# Altium PCB PCB1.PcbDoc
Units mil, origin at the board's own origin, x right, y up, seen from the top; angles counter-clockwise.
Board outline 1300.91 x 945 mil, 2 copper layers (Top Layer, Bottom Layer); 28 components, 25 nets, 113 pads, 80 vias.
Unrouted connection lines stored in the file: 49.
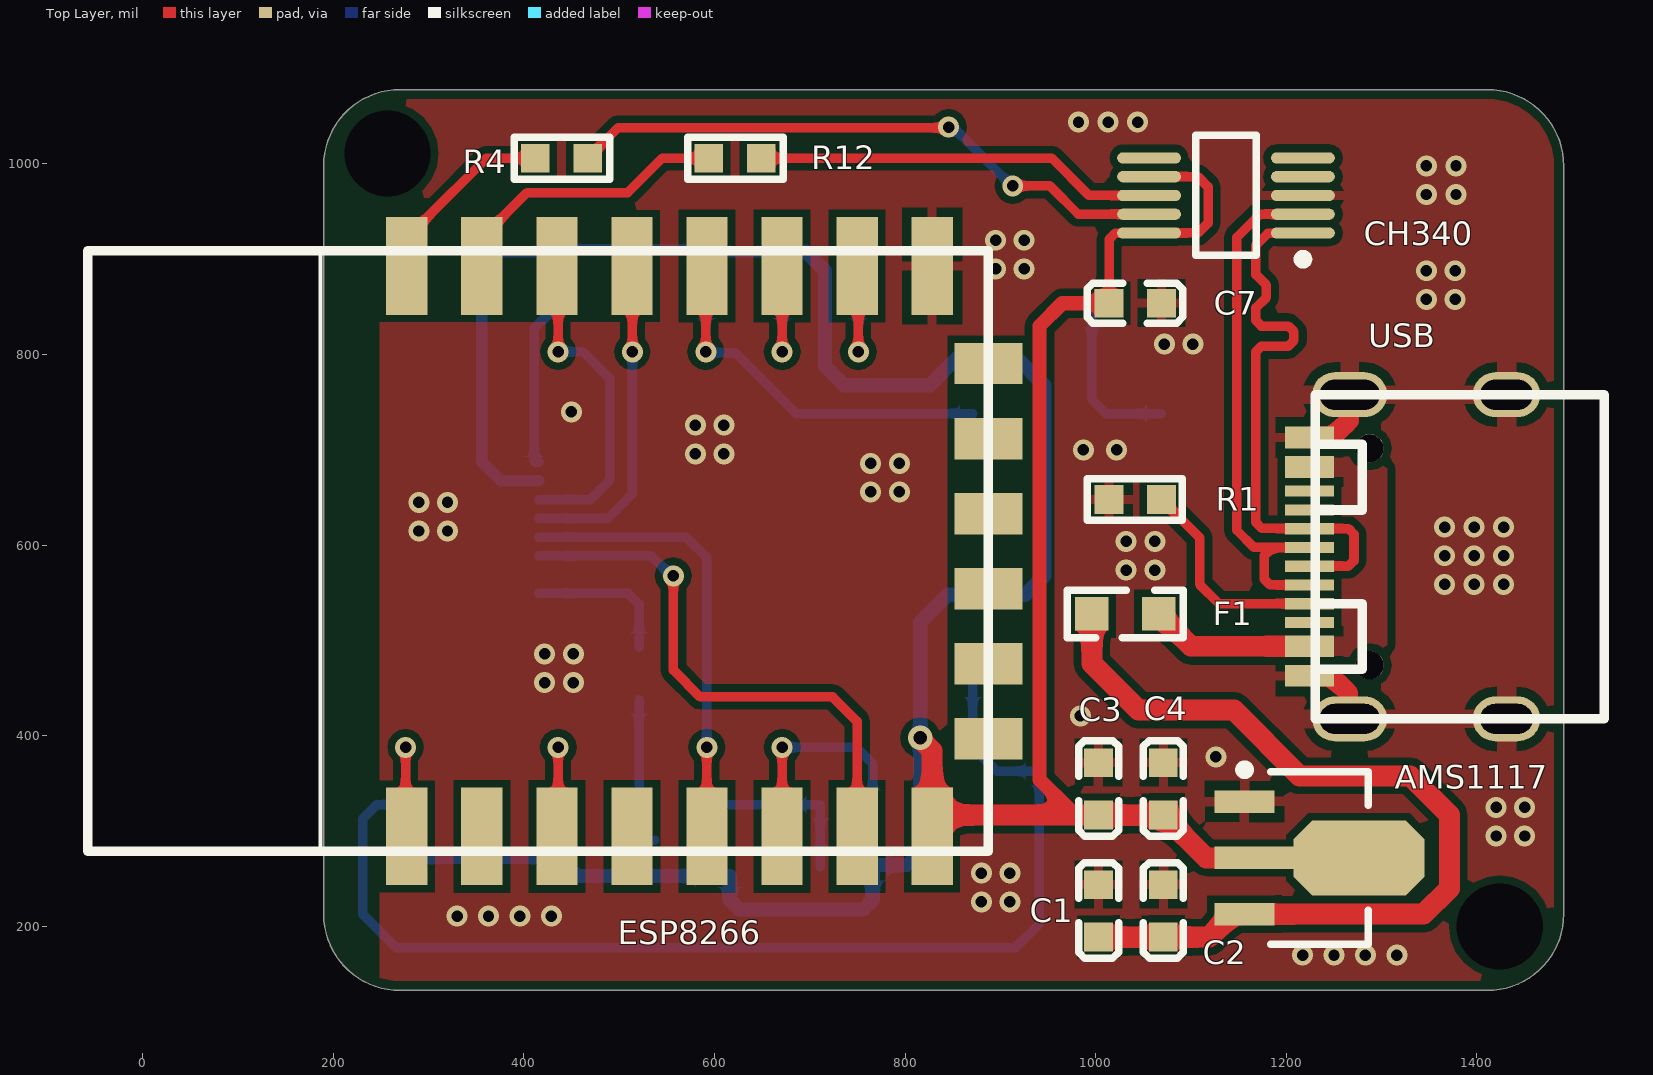
[diagram p0: Top Layer view]
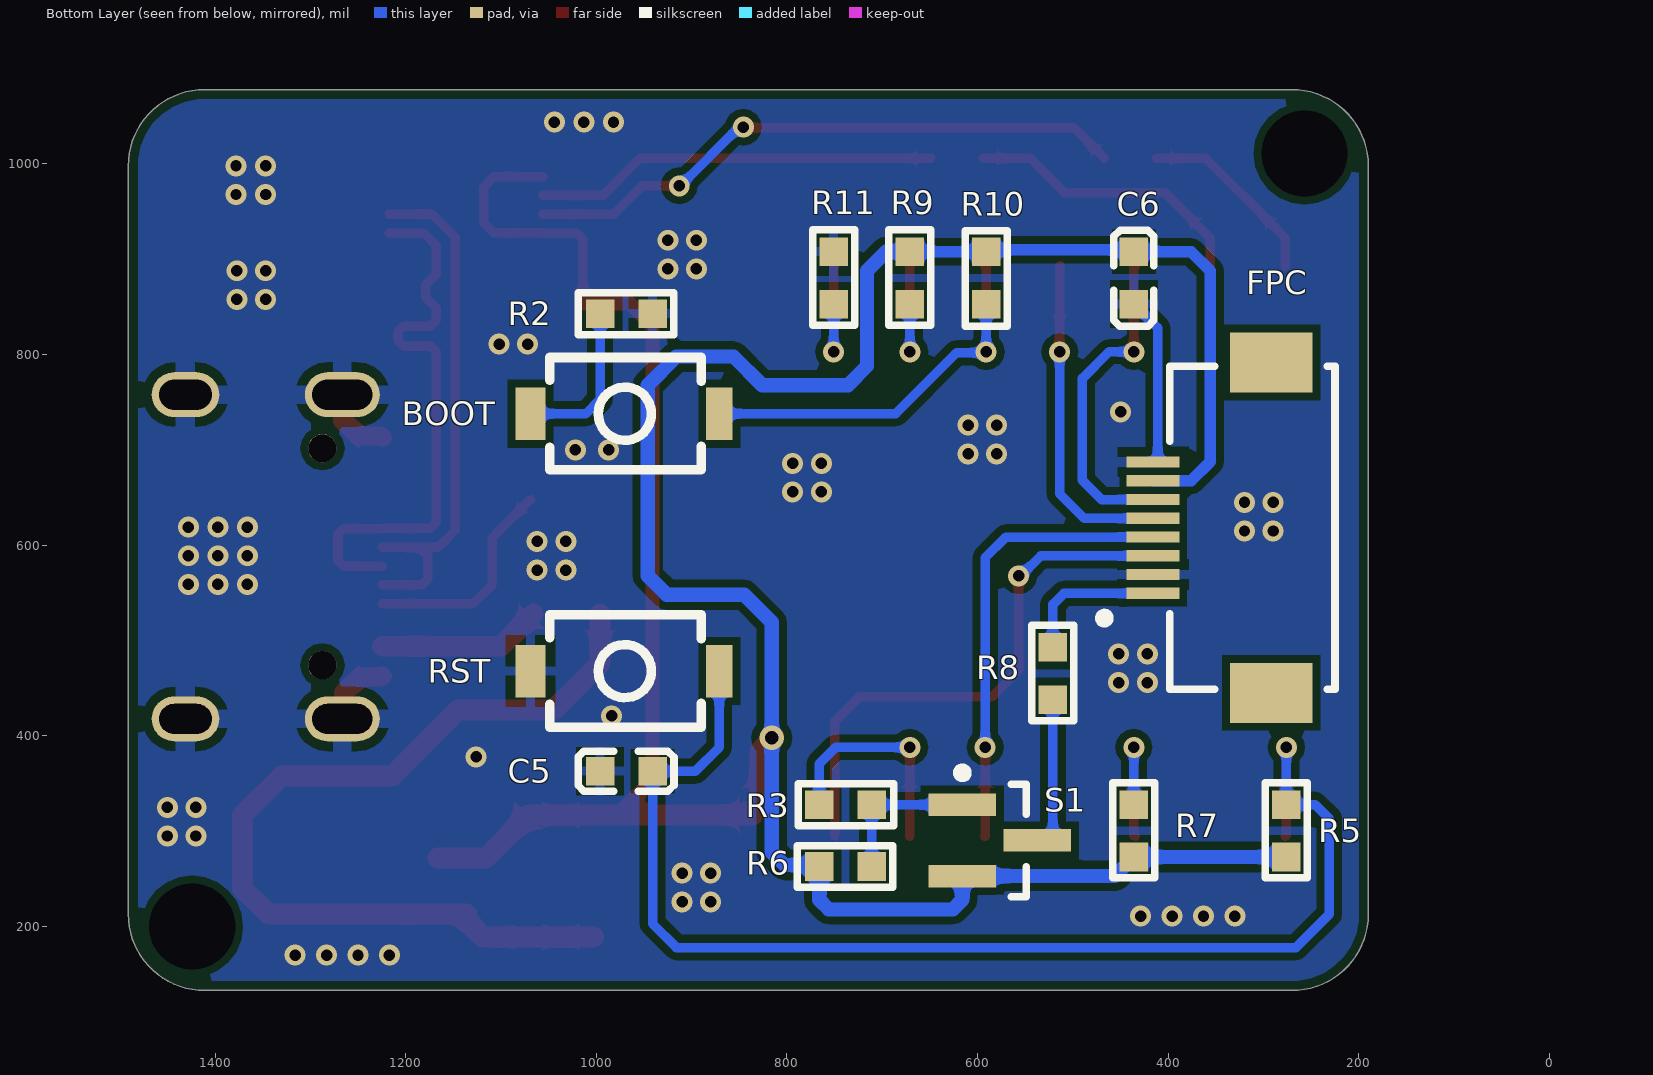
[diagram p1: Bottom Layer view, seen from below]
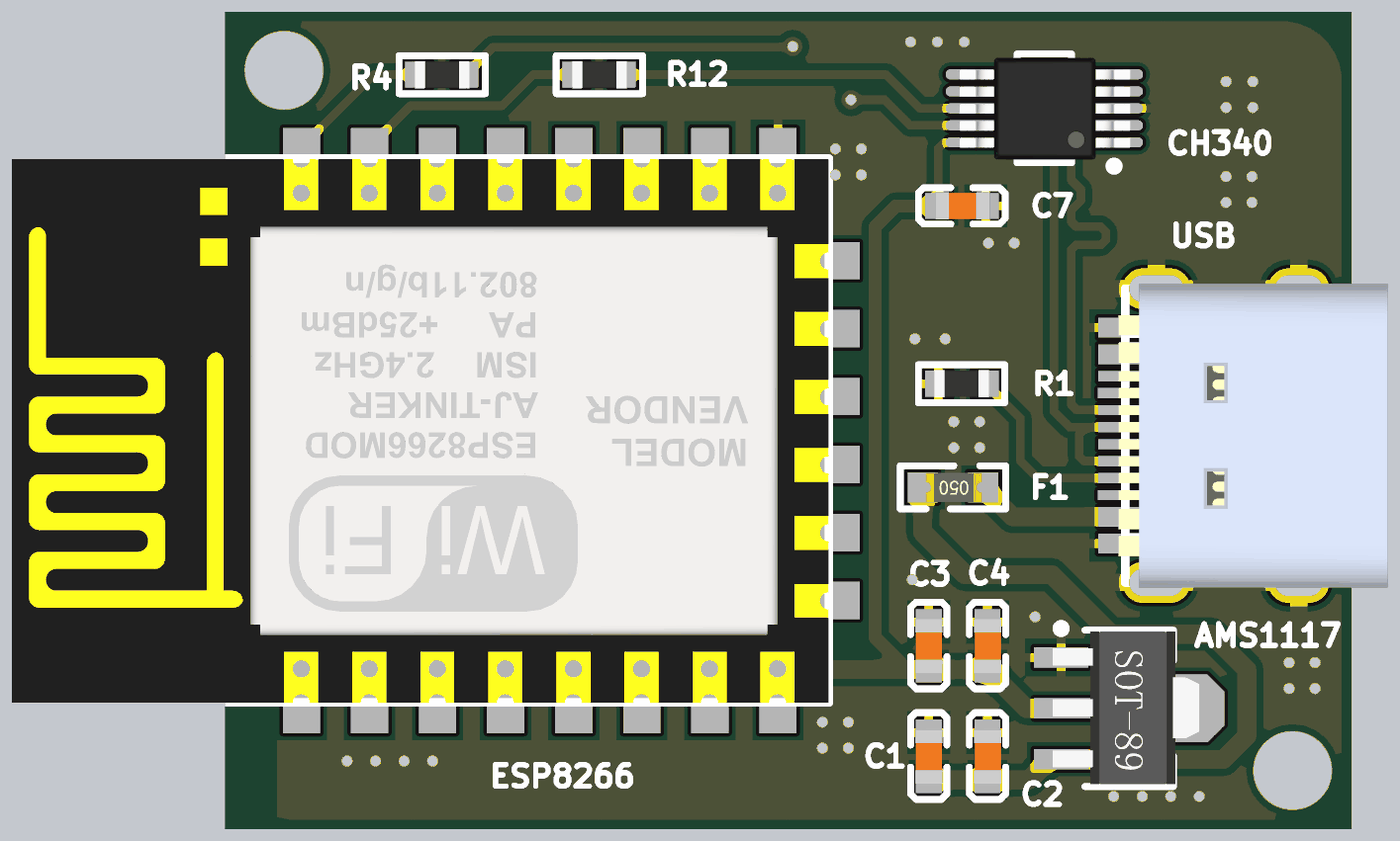
[diagram p2: 3D render of the assembled board from above, using the file's embedded part models]
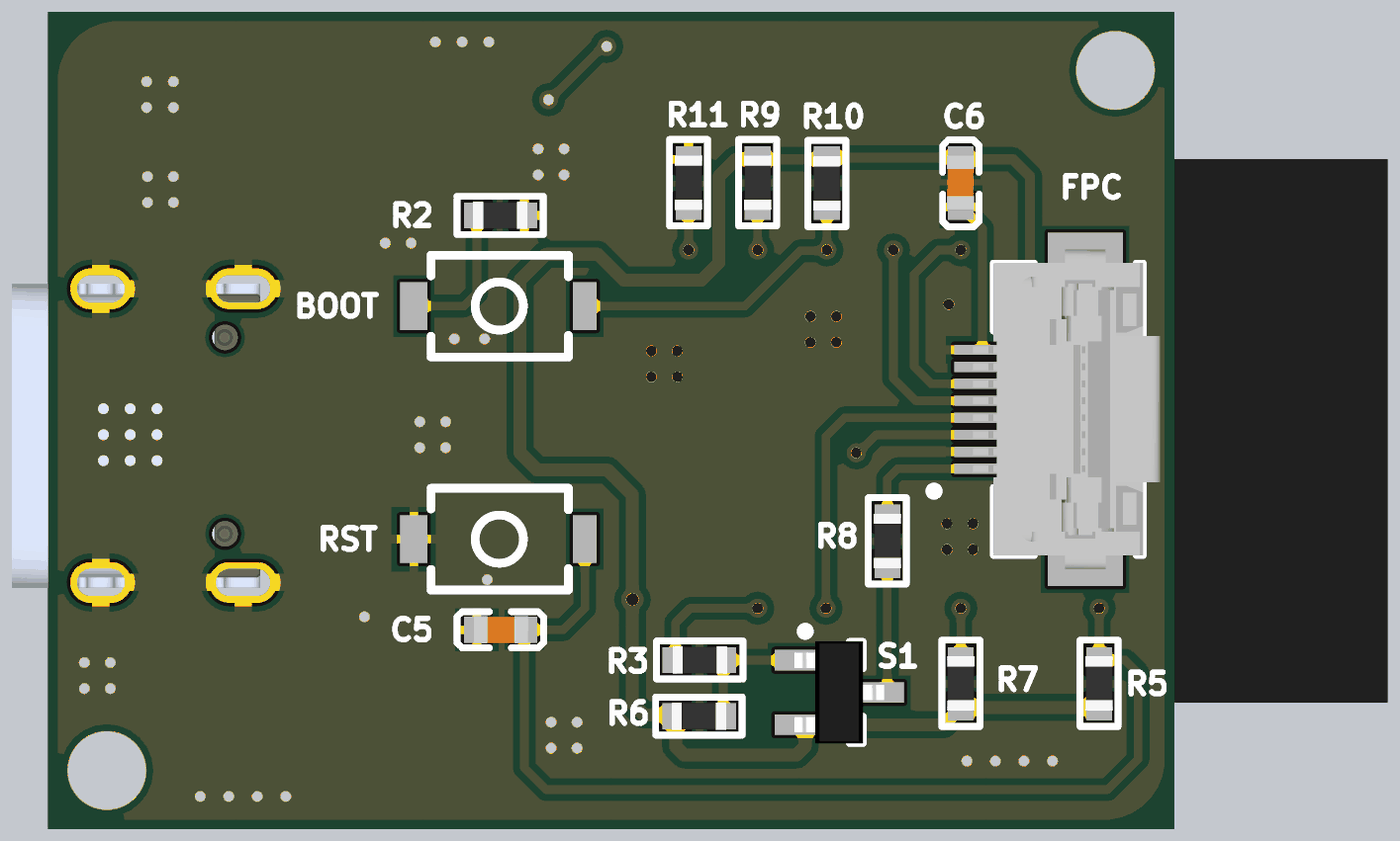
[diagram p3: 3D render of the assembled board from below, using the file's embedded part models]

## Layer stack, top to bottom
Top Solder: solder mask 0.4, Solder Resist, Dk 3.5
Top Layer: signal copper 1.4
Dielectric 1: dielectric 12.6, FR-4, Dk 4.8
Bottom Layer: signal copper 1.4
Bottom Solder: solder mask 0.4, Solder Resist, Dk 3.5

## Board outline
190.09,213 190.09,998 cw(c270.09,998) 270.09,1078 266,1078 1410,1078 1411,1078 cw(c1411,998) 1491,998 1491,213 cw(c1411,213) 1411,133 266,133 270.09,133 cw(c270.09,213)

## Design rules (kind name [scope] priority, off if disabled: settings)
BoardOutlineClearance [All] p1: gap=10 ignorepadtopadclearanceinfootprint=FALSE except(0: Arc-SplitContinuation Track-SplitContinuation SMDPad-SplitContinuation THPad-SplitContinuation Via-SplitContinuation Fill-SplitContinuation Poly-SplitContinuation Region-SplitContinuation Text-SplitContinuation)
Clearance [All] p1: gap=8 ignorepadtopadclearanceinfootprint=TRUE except(0: Arc-Hole Track-Hole SMDPad-Hole THPad-Hole Via-Hole Fill-Hole Poly-Hole Region-Hole Text-Hole)
DiffPairsRouting DiffPair_90omDiffPairsRouting [InDifferentialPair ('NewDifferentialPair1')] p1: maxlimit=10 minlimit=10 mostfreqgap=10 toplayer_minwidth=10 toplayer_maxwidth=10 toplayer_prefwidth=10 bottomlayer_minwidth=10 bottomlayer_maxwidth=10 bottomlayer_prefwidth=10 maxuncoupledlength=10
DiffPairsRouting [All] p2: maxlimit=10 minlimit=10 mostfreqgap=10 toplayer_minwidth=15 toplayer_maxwidth=15 toplayer_prefwidth=15 bottomlayer_minwidth=15 bottomlayer_maxwidth=15 bottomlayer_prefwidth=15 maxuncoupledlength=500
MatchedLengths [InDifferentialPair ('NewDifferentialPair1')] p1: tolerance=1000 checknetsindiffpair=FALSE checkdiffpairvsdiffpair=TRUE checkxsignals=TRUE checkothers=TRUE
MatchedLengths DiffPair_90omMatchedLengths [InDifferentialPair ('NewDifferentialPair1')] p2: tolerance=10 checknetsindiffpair=FALSE checkdiffpairvsdiffpair=TRUE checkxsignals=TRUE checkothers=TRUE
PolygonConnect [All] p1: thpad.connectstyle=Relief thpad.reliefconductorwidth=20 thpad.reliefentries=4 thpad.polygonreliefangle="90 Angle" thpad.airgapwidth=10 smdpad.connectstyle=Relief smdpad.reliefconductorwidth=10 smdpad.reliefentries=4 smdpad.polygonreliefangle="90 Angle" smdpad.airgapwidth=10 via.connectstyle=Direct via.reliefconductorwidth=10 via.reliefentries=4 via.polygonreliefangle="90 Angle" via.airgapwidth=10
RoomDefinition PCB12 [InComponentClass('PCB12')] p1: confinementstyle=ConfineIn formatcopy=TRUE lockcomponents=FALSE outline -3254,-2662 -1254,-2662 -1254,-1662 -3254,-1662
RoutingVias [All] p1: holewidth=12 width=22 viastyle="Through Hole" minholewidth=12 minwidth=22 maxholewidth=12 maxwidth=22
SolderMaskExpansion [All] p1: expansion=4 istentingtop=FALSE
Width Width_1 [InNetClass('PWR')] p1: maxlimit=23.62 minlimit=10 preferedwidth=15
Width [All] p2: maxlimit=20 minlimit=10 preferedwidth=10
29 further rules are at their usual default settings.

## Components (designator, comment, footprint, x,y, rotation, side; value= is the part's Value field where it differs from the comment)
AMS1117 "AMS-3V3" SOT89-M 1272.9,524 r270 top
BOOT "KEY3*4mm" KEY3*4mm 871,738 r270 bottom
C1 "CAP" 0603-C 1004,244 r270 top value=104
C2 "CAP" 0603-C 1072,244 r270 top value=106
C3 "CAP" 0603-C 1004,372 r270 top value=104
C4 "CAP" 0603-C 1072,372 r270 top value=106
C5 "CAP" 0603-C 996,364 r180 bottom value=104
C6 "CAP" 0603-C 437,853 r90 bottom value=104
C7 "CAP" 0603-C 1014,855 r0 top value=104
CH340 "CH340E" CH340E 1217.42,927.63 r180 top
ESP8266 "ESP8266-12F" ESP8266-12F 277.3,294.57 r90 top
F1 "750ma  6V" PTC-0603 1066,528 r180 top
FPC "FPC Connector" "FPC Connector" 416,549.57 r180 bottom
R1 "RES" 0603-R 1014,648 r0 top value=5.1K
R2 "RES" 0603-R 996,843 r180 bottom value=470
R3 "RES" 0603-R 711,328 r0 bottom value=1K
R4 "RES" 0603-R 467,1006 r180 top value=300
R5 "RES" 0603-R 276,328 r270 bottom value=10K
R6 "RES" 0603-R 766,263 r180 bottom value=10K
R7 "RES" 0603-R 436,328 r270 bottom value=10K
R8 "RES" 0603-R 521,493 r270 bottom value=10
R9 "RES" 0603-R 671,908 r270 bottom value=10K
R10 "RES" 0603-R 591,853 r90 bottom value=10K
R11 "RES" 0603-R 751,908 r270 bottom value=10K
R12 "RES" 0603-R 649,1006 r180 top value=300
RST "KEY3*4mm" KEY3*4mm 871,468 r270 bottom
S1 "S8550" S8550 616,327.8 r270 bottom
USB "TYPE-C" TYPE-C 1431,417.84 r90 top

## Footprints (in the part's own frame and the unit in brackets; to place one, negate y for a bottom-side part, rotate by r counter-clockwise, add the part's x,y. Pads: shape width x height; smd on the part's side, far side on the other; paste and mask are expansions set on the pad)
0603-C [mil]
  rect 30x30 smd: 1(0,-1) 2(55,-1)
  silkscreen extent -23,-22 78,20, body extent -3,-16 59,15, height 20
0603-R [mil]
  rect 30x30 smd: 1(0,0) 2(55,0)
  silkscreen extent -23,-22 77,22, body extent -4,-16 59,16, height 16
CH340E [mm]
  oval 1.7x0.3 smd: 1(0,0) 2(0,-0.5) 3(0,-1) 4(0,-1.5) 5(0,-2) 6(4.1,-2) 7(4.1,-1.5) 8(4.1,-1) 9(4.1,-0.5) 10(4.1,0)
  silkscreen extent -0.13,-2.6 2.85,0.82, body extent -0.48,-2.49 4.55,0.51, height 1.05
ESP8266-12F [mm]
  rect 2.6x1.1 smd: 1(0,0) 2(0,-2) 3(0,-4) 4(0,-6) 5(0,-8) 6(0,-10) 7(0,-12) 8(0,-14) 15(15.2,-14) 16(15.2,-12) 17(15.2,-10) 18(15.2,-8) 19(15.2,-6) 20(15.2,-4) 21(15.2,-2) 22(15.2,0)
  rect 1.1x1.8 smd: 9(2.6,-15.5) 10(4.6,-15.5) 11(6.6,-15.5) 12(8.6,-15.5) 13(10.6,-15.5) 14(12.6,-15.5)
  silkscreen extent -0.4,-15.5 15.6,8.5, body extent -0.42,-15.5 15.59,8.51, height 2.65
"FPC Connector" [mm]
  rect 1.4x0.3 smd: 1(0,0) 2(0,0.5) 3(0,1) 4(0,1.5) 5(0,2) 6(0,2.5) 7(0,3) 8(0,3.5)
  rect 2.2x1.6 smd: MP1(3.15,-2.65) MP2(3.15,6.15)
  silkscreen extent -1.42,-2.55 4.85,6.05, body extent -0.15,-2.95 5.35,6.45, height 2.08
KEY3*4mm [mm]
  rect 1.4x0.7 smd: 1(0,0)
  rect 1.4x0.8 smd: 2(0,-5.029)
  silkscreen extent -1.5,-4.52 1.5,-0.48, body extent -1.45,-5.21 1.45,0.19, height 2
PTC-0603 [mil] "保险丝"
  rect 35x35 smd: 1(0,0) 2(70,0)
  silkscreen extent -26,-25 96,25, body extent 2,-17 66,17, height 16
S8550 [mm]
  rect 0.6x1.8 smd: 1(0,0) 2(1.9,0) 3(0.95,2)
  silkscreen extent -0.97,-0.13 2.45,1.7, body extent -0.55,-0.32 2.45,2.32, height 1.08
SOT89-M [mm]
  oct 2x3.5 smd: 0(6.401,0.085)
  rect 0.6x1.6 smd: 1(4.901,-2.965) 3(7.901,-2.965)
  rect 0.6x2.1 smd: 2(6.401,-2.715)
  silkscreen extent 3.93,-3.09 8.7,0.33, body extent 4.14,-3.21 8.64,1.09, height 1.51
TYPE-C [mm]
  oval 1.2x1.8 hole 0.8 slot 1.4 at 90 deg: 1(0,0) 2(8.64,0)
  oval 1.2x2 hole 0.8 slot 1.6 at 90 deg: 3(0,4.18) 4(8.64,4.18)
  rect 0.58x1.3 smd paste+0: A1B12(1.148,5.247)
  rect 0.58x1.3 smd: A4B9(1.935,5.247) B1A12(7.498,5.247) B4A9(6.71,5.247)
  rect 0.3x1.3 smd: A5(3.07,5.247) A6(4.07,5.247) A7(4.57,5.247) A8(5.57,5.248) B5(6.07,5.247) B6(5.07,5.247) B7(3.57,5.247) B8(2.57,5.248)
  round 0.75 hole 0.75 unplated: ""(1.43,3.65) ""(7.21,3.65)
  silkscreen extent 0,-2.6 8.64,5.1, body extent -0.15,-2.61 8.79,5.29, height 3.21

## Part data
C1 C2 C3 C4 C5 C6 C7: "电容-0603"
F1: library part FU, "贴片保险丝"
R1 R2 R3 R4 R5 R6 R7 R8 R9 R10 R11 R12: "电阻-0603"

## Free pads (board coordinates)
  round 0 hole 90.55: 0(257.09,1011) 0(1424,200)

## Via types
v1: diameter 22, hole 12, Top Layer to Bottom Layer, tented both sides, 79 vias
v2: diameter 26, hole 14, Top Layer to Bottom Layer, tented both sides, 1 vias

## Nets (pads, with @x,y where several pads share a name; then routed paths per layer and width w, separated by ;. In a path a pad name is that pad's centre, name@x,y a point inside that pad or via, vN(x,y) a via of type N, cw(c..) or ccw(c..) an arc to the next point about the centre after c; other vN are vias at no path point)
3.3V: AMS1117.2 C3.2 C4.2 C6.2 C7.1 CH340.7 CH340.10 ESP8266.8 FPC.7 R5.2 R6.1 R7.2 R9.1 R10.2 S1.2 | length 3572.8
  Top Layer w10: ESP8266.8@828.48,326 836.13,326 845.13,326 ESP8266.8@836.13,317 ; C7.1 1014,920.87 1020.42,927.28 1055.65,927.28 CH340.10 1107.63,927.63 1118,938 1118,976 1107.31,986.68 CH340.7
  Top Layer w15: 978,317 941,354 941,830 965,854 C7.1
  Top Layer w22: v2(816,398) 816,396.92 828.48,384.44 ESP8266.8@828.48,326 ; ESP8266.8@836.13,317 845.13,317 978,317 C3.2 C4.2 1116,272 AMS1117.2
  Bottom Layer w12: FPC.7 376,667.68 356,687.68 356,888 376,908 C6.2 437.94,909.94 589.06,909.94 R10.2 R9.1
  Bottom Layer w15: R5.2 R7.2 456,253 S1.2 616,228 626,218 756,218 766,228 R6.1 767.53,264.53 802.53,264.53 816,278 v2(816,398) 816,519.21 844.79,548 926,548 946,568 946,768 916,798 856,798 826,768 736,768 716,788 716,888 696,908 R9.1
BLK: ESP8266.6 R3.2 | length 238.5
  Top Layer w10: ESP8266.6 v1(671,388)
  Bottom Layer w10: v1(671,388) 749,388 766,371 R3.2
BOOT: BOOT.1 ESP8266.18 R10.1 | length 447.4
  Top Layer w10: v1(591,803) 591,891.74 ESP8266.18
  Bottom Layer w10: R10.1 v1(591,803) 592,802 622,802 686,738 BOOT.1
CH340_RX: CH340.9 R4.1 | length 641.5
  Top Layer w10: R4.1 499,1038 836.51,1038 837.22,1038.7 v1(845.7,1038.7) ; v1(913,977) 952,977 981.69,947.31 CH340.9
  Bottom Layer w10: v1(845.7,1038.7) 850.3,1038.7 912,977 v1(913,977) v1@913,978.14
CH340_TX: CH340.8 R12.1 | length 423.2
  Top Layer w10: R12.1 954,1006 993,967 CH340.8
GND: AMS1117.1 C1.1 C2.1 C3.1 C4.1 C5.1 C6.1 C7.2 CH340.3 ESP8266.15 FPC.2 FPC.8 R1.1 R2.2 R11.1 RST.2 USB.1 USB.2 USB.3 USB.4 USB.A1B12 USB.B1A12 | length 332.5
  Top Layer w20: USB.A1B12 1225.83,461.61 1248.39,461.61 1265,445 1265,419.27 USB.3 ; USB.B1A12 1225.83,714.45 1249.45,714.45 1266,731 1266,757.57 USB.4
  Bottom Layer w10: FPC.8 411.91,687.37 411,688.28 411,828 C6.1
  other v1: 1217,170 1250,170 1283,170 1316,170 330,211 363,211 396,211 429,211 880,226 910,226 880,256 910,256 1420,295 1450,295 1420,325 1450,325 1126,378 984,421 422,456 452,456 422,486 452,486 1366,559 1397,559 1428,559 1032,574 1062,574 1366,589 1397,589 1428,589 1032,604 1062,604 290,615 320,615 1366,619 1397,619 1428,619 290,645 320,645 764,656 794,656 764,686 794,686 580,696 610,696 987,700 1022,700 580,726 610,726 450,740 1072,811 1102,811 1347,858 1377,858 1347,888 1377,888 895,890 925,890 895,920 925,920 1347,968 1378,968 1347,998 1378,998 982,1044 1013,1044 1044,1044
LEDA: FPC.1 R8.1 | length 154.8
  Bottom Layer w10: FPC.1 509.43,549.57 521,538 R8.1
NetAMS1117_3: AMS1117.3 C1.2 C2.2 F1.2 | length 962.8
  Top Layer w22: F1.2 996,476 1045,427 1145,427 1214,358 1330,358 1371,317 1371,240 1343.94,212.94 AMS1117.3 1136.47,212.94 1135.66,212.13 1135.66,205.66 1119,189 C2.2 C1.2
NetBOOT_2: BOOT.2 R2.1 | length 169.2
  Bottom Layer w10: R2.1 996,753 1011,738 BOOT.2
NetESP8266_3: ESP8266.3 R7.1 | length 153.9
  Top Layer w10: ESP8266.3 436,295.79 v1(436,388)
  Bottom Layer w10: R7.1 v1(436,388)
NetESP8266_16: ESP8266.16 R11.2 | length 140.5
  Top Layer w10: ESP8266.16 751,891.74 v1(751,803)
  Bottom Layer w10: v1(751,803) R11.2
NetESP8266_17: ESP8266.17 R9.2 | length 140
  Top Layer w10: v1(671,803) ESP8266.17
  Bottom Layer w10: v1(671,803) R9.2
NetESP8266_21: ESP8266.21 R12.2 | length 302.1
  Top Layer w10: ESP8266.21 356.04,922.53 403.51,970 509.06,970 545.06,1006 R12.2
NetESP8266_22: ESP8266.22 R4.2 | length 198.8
  Top Layer w10: ESP8266.22 277.3,922.53 293.95,939.18 360.77,1006 R4.2
NetR1_2: R1.2 USB.A5 | length 229.4
  Top Layer w10: R1.2 1109,608 1109,559 1129.29,538.71 USB.A5
NetR3_1: R3.1 R6.2 S1.1 | length 160.1
  Bottom Layer w10: S1.1 710.8,327.8 R3.1 R6.2
NetR8_2: R8.2 S1.3 | length 159.9
  Bottom Layer w10: R8.2 521,297.21 527.81,290.4 S1.3
RES: ESP8266.7 FPC.3 | length 584.4
  Top Layer w10: v1(557,568) 557,469 585,441 724,441 749.74,415.26 ESP8266.7
  Bottom Layer w10: FPC.3 533.81,588.94 554.75,568 v1(557,568)
RS: ESP8266.5 FPC.4 | length 477.5
  Top Layer w10: v1(592,388) 592,294.83 ESP8266.5
  Bottom Layer w10: FPC.4 570.37,608.63 592,587 v1(592,388)
RST: C5.2 ESP8266.1 R5.1 RST.1 | length 1365.4
  Top Layer w10: v1(276,388) 276,295.87 ESP8266.1
  Bottom Layer w10: v1(276,388) R5.1 246,328 231,313 231,213 266,178 916,178 941,203 C5.2@941,368 ; RST.1 871,388 896,363 C5.2
SCL: ESP8266.20 FPC.6 | length 345.4
  Top Layer w10: ESP8266.20 436,891.78 v1(436,803)
  Bottom Layer w10: FPC.6 470,648 490,668 490,775 462,803 v1(436,803)
SDA: ESP8266.19 FPC.5 | length 347.8
  Top Layer w10: ESP8266.19 514,892.52 v1(514,803)
  Bottom Layer w10: FPC.5 488.32,628.32 514,654 v1(514,803)
UD+: CH340.1 USB.A6 USB.B6 | length 605.7
  Top Layer w10: CH340.1 1217.1,927.31 1180.61,927.31 1168,914.71 1168,884 1179,873 1179,860.13 1168,849.13 1168,835.86 1173.86,830 1202.14,830 1208,824.14 1208,814.86 1202.14,809 1173.86,809 1168,803.14 1168,624 1174.24,617.76 1224.1,617.76 USB.B6 1265.14,617.45 1271,611.59 1271,583.94 1265.14,578.08 USB.A6
UD-: CH340.2 USB.A7 USB.B7 | length 557.3
  Top Layer w10: CH340.2 1172.32,947.31 1148,922.99 1148,615.72 1165.96,597.76 1185,597.76 ; USB.B7 1182.86,558.39 1177,564.25 1177,589.76 1185,597.76 ; USB.A7 1185,597.76
VBUS: F1.1 USB.A4B9 USB.B4A9 | length 172.5
  Top Layer w21.65: F1.1 1099.97,494.03 USB.A4B9
pads on no net: AMS1117.0 CH340.4 CH340.5 CH340.6 ESP8266.2 ESP8266.4 ESP8266.9 ESP8266.10 ESP8266.11 ESP8266.12 ESP8266.13 ESP8266.14 FPC.MP1 FPC.MP2 USB. USB.A8 USB.B5 USB.B8

## Polygon pours and split planes (outlines as drawn)
GND on Top Layer "Top Layer-No Net" (solid, remove dead copper, pour order 3): 190.09,213 190.09,998 cw(c270.09,998) 270.09,1078 266,1078 1410,1078 1411,1078 cw(c1411,998) 1491,998 1491,213 cw(c1411,213) 1411,133 266,133 270.09,133 cw(c270.09,213)
VBUS on Top Layer "VBUS_L01_P000" (solid, remove dead copper, pour order 0): 1195,693 1306,693 1306,483 1195,483
GND on Bottom Layer "Top Layer-No Net1" (solid, remove dead copper, pour order 4): 190.09,213 190.09,998 cw(c270.09,998) 270.09,1078 266,1078 1410,1078 1411,1078 cw(c1411,998) 1491,998 1491,213 cw(c1411,213) 1411,133 266,133 270.09,133 cw(c270.09,213)

## Other copper
Top Layer:
  pour cut-out: 844.1,820.29 844.1,409.34 846.44,407 924,407 924,819.04 925.25,820.29
  pour cut-out: 247.65,833.82 500.75,833.82 501,834.07 501,963 248.67,963 244.58,958.91
  pour cut-out: 163.2,1103 249,1103 249,111.91 166.52,111.91

## Silkscreen, mask and mechanical layers (free items; w line width, h text height)
Mechanical 1:
  lines w10: 190.09,998 cw(c270.09,998) 270.09,1078 ; 190.09,1003 190.09,213 ccw(c270.09,213) 270.09,133 ; 266,133 1411,133 ccw(c1411,213) 1491,213 1491,1001 ; 266,1078 1410,1078 ; 1411,1078 cw(c1411,998) 1491,998